# Altium PCB PCB1.PcbDoc
Units mil, origin at the board's own origin, x right, y up, seen from the top; angles counter-clockwise.
Board outline 775 x 600 mil, 2 copper layers (Top Layer, Bottom Layer); 1 components, 0 nets, 17 pads, 0 vias.
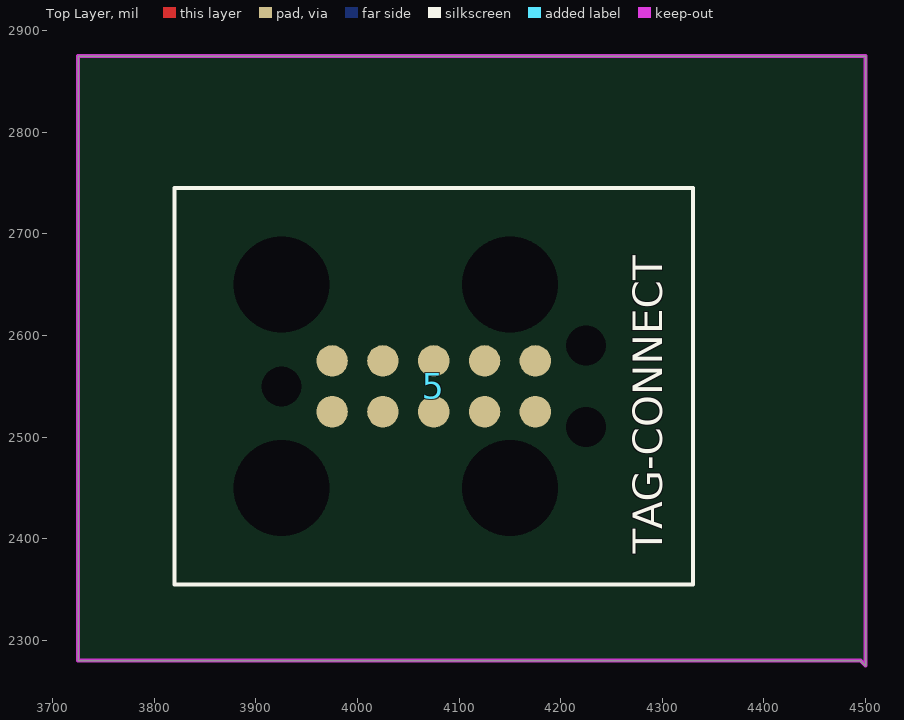
[diagram p0: Top Layer view]
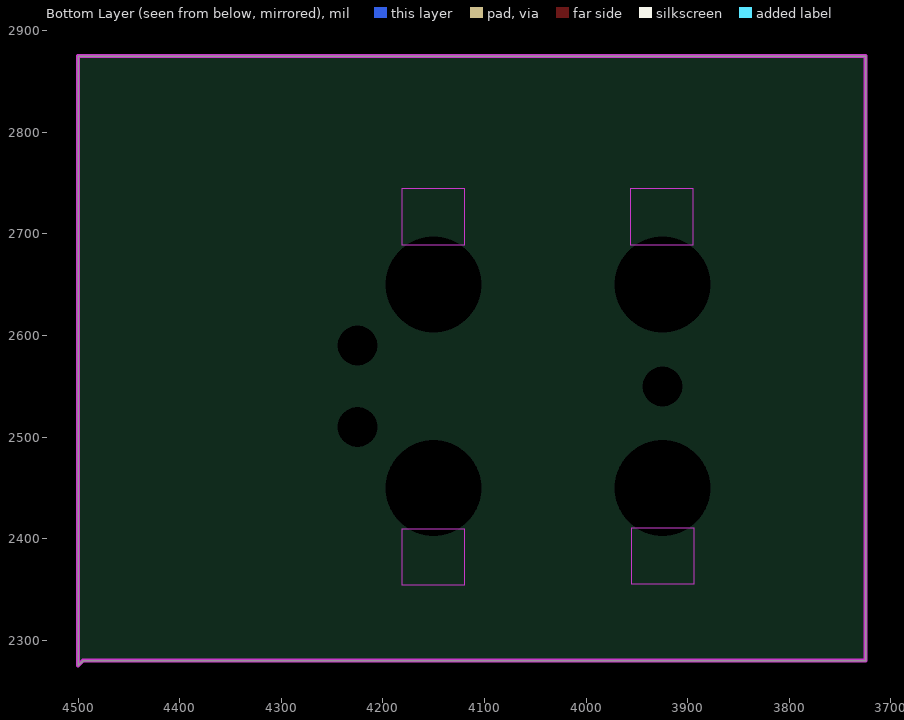
[diagram p1: Bottom Layer view, seen from below]

## Layer stack, top to bottom
Top Layer: signal copper 1.4
Dielectric: dielectric 12.6, FR-4, Dk 4.8
Bottom Layer: signal copper 1.4

## Board outline
3725,2280 3725,2875 4500,2875 4500,2275 4495,2280

## Design rules (kind name [scope] priority, off if disabled: settings)
Clearance [All] p1: gap=10
PolygonConnect [All] p1: connectstyle=Relief reliefconductorwidth=10 reliefentries=4 polygonreliefangle="90 Angle"
RoutingVias [All] p1: holewidth=28 width=50 viastyle="Through Hole" minholewidth=28 minwidth=50 maxholewidth=28 maxwidth=50
SilkscreenOverComponentPads [All] p1: minsilkscreentomaskgap=10
SolderMaskExpansion [All] p1: expansion=4
Width [All] p1: maxlimit=10 minlimit=10 preferedwidth=10
27 further rules are at their usual default settings.

## Components (designator, comment, footprint, x,y, rotation, side; value= is the part's Value field where it differs from the comment)
5 "0" CO400/0037-0 3925,2550 r0 top

## Footprints (in the part's own frame and the unit in brackets; to place one, negate y for a bottom-side part, rotate by r counter-clockwise, add the part's x,y. Pads: shape width x height; smd on the part's side, far side on the other; paste and mask are expansions set on the pad)
CO400/0037-0 [mil] "TAG-Connect TC2050-IDC-FP"
  round 0 hole 94.49 unplated: 0(0,-100) 0(0,100) 0(225,-100) 0(225,100)
  round 0 hole 39.37 unplated: 0(0,0) 0(300,-39.96) 0(300,39.96)
  round 31 smd paste-31.5 mask+3.94: 1(50,-25) 2(100,-25) 3(150,-25) 4(200,-25) 5(250,-25) 6(250,25) 7(200,25) 8(150,25) 9(100,25) 10(50,25)
  Bottom Layer keep-out region: -30,139 31,139 31,195 -30,195
  Bottom Layer keep-out region: 195,139 256,139 256,195 195,195
  Bottom Layer keep-out region: 195,-196 256,-196 256,-140 195,-140
  Bottom Layer keep-out region: -31,-195 30,-195 30,-139 -31,-139
  silkscreen extent -105,-195 405,195

## Part data
5: library part CO400/0037-0

## Nets (pads, with @x,y where several pads share a name; then routed paths per layer and width w, separated by ;. In a path a pad name is that pad's centre, name@x,y a point inside that pad or via, vN(x,y) a via of type N, cw(c..) or ccw(c..) an arc to the next point about the centre after c; other vN are vias at no path point)
pads on no net: 5.0 5.1 5.2 5.3 5.4 5.5 5.6 5.7 5.8 5.9 5.10

## Keep-outs
Keep-Out Layer:
  the board outline again, w3.94

## Text inside footprints (layer, text, board x,y; h text height)
5: Top Overlay "TAG-CONNECT" at 4310,2385 h50 r90